# Altium PCB PCB1.PcbDoc
Units mm, origin at the board's own origin, x right, y up, seen from the top; angles counter-clockwise.
Board outline 165.61 x 94.78 mm, 2 copper layers (Top Layer, Bottom Layer); 19 components, 32 nets, 110 pads, 0 vias.
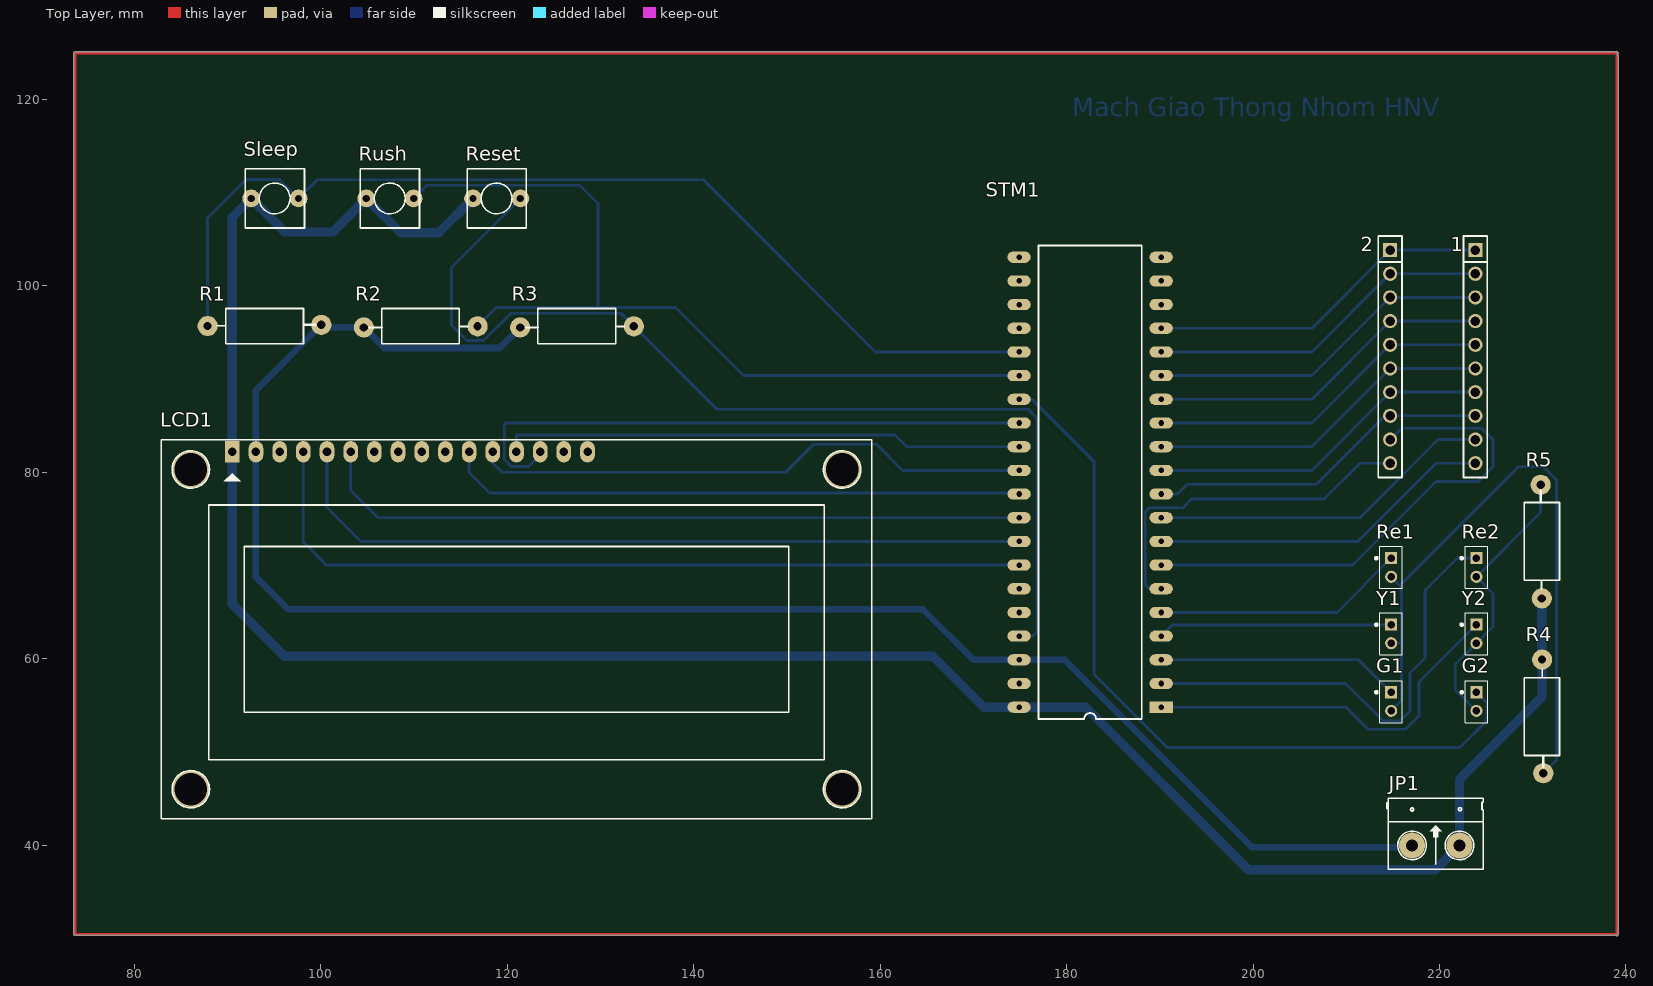
[diagram p0: Top Layer view]
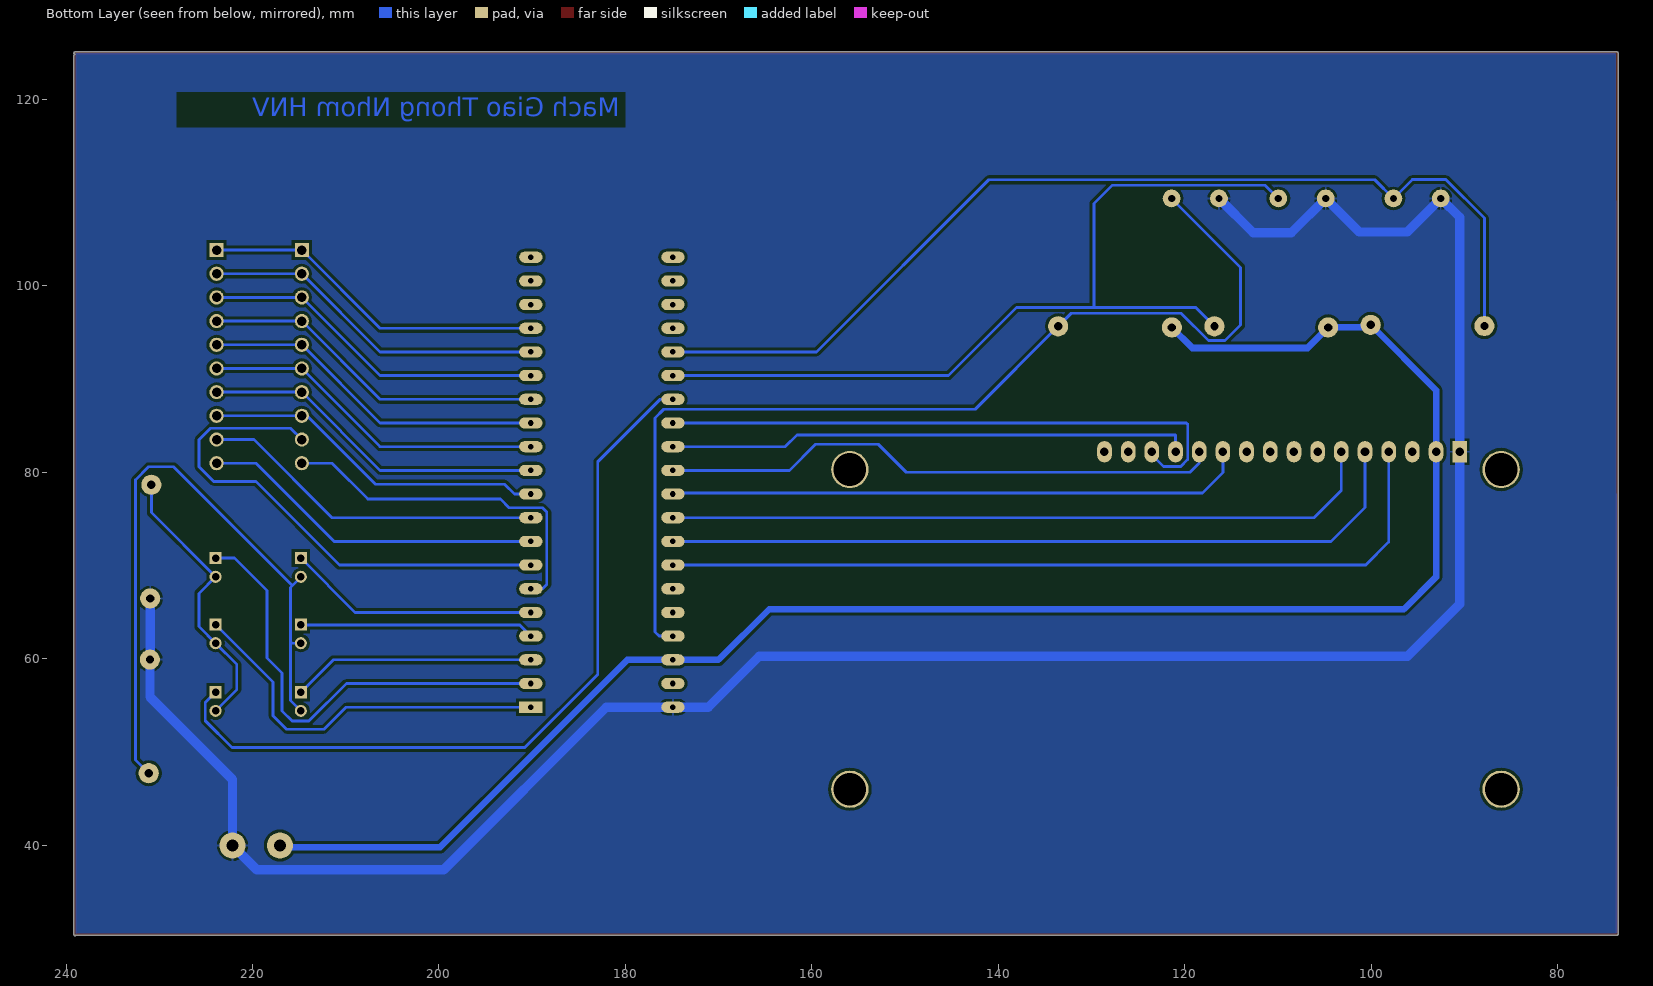
[diagram p1: Bottom Layer view, seen from below]
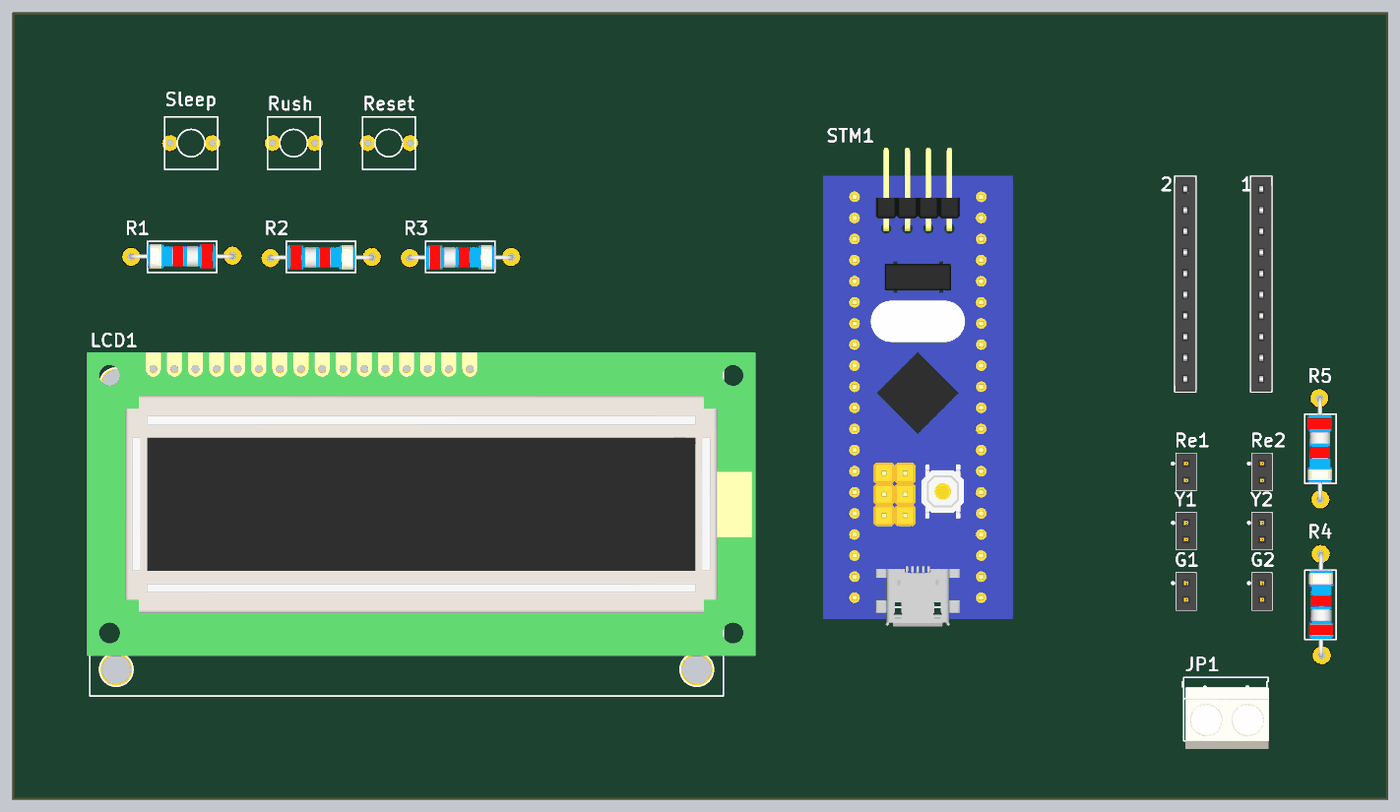
[diagram p2: 3D render of the assembled board from above, using the file's embedded part models]

## Layer stack, top to bottom
Top Solder: solder mask 0.0102, Solder Resist, Dk 3.5
Top Layer: signal copper 0.0356
Dielectric 1: dielectric 0.32, FR-4, Dk 4.8
Bottom Layer: signal copper 0.0356
Bottom Solder: solder mask 0.0102, Solder Resist, Dk 3.5

## Board outline
73.543,30.45 ccw(c73.67,30.45) 73.67,30.323 238.941,30.323 ccw(c239.026,30.418) 239.154,30.418 239.154,31.119 ccw(c239.026,31.119) 239.152,31.141 239.152,124.684 ccw(c239.024,124.684) 239.034,124.811 ccw(c239.024,124.938) 239.152,124.938 ccw(c239.024,124.938) 239.024,125.066 73.67,125.066 ccw(c73.67,124.938) 73.543,124.938

## Design rules (kind name [scope] priority, off if disabled: settings)
Clearance [All] p1: gap=0.3
PolygonConnect [All] p1: connectstyle=Relief reliefconductorwidth=0.254 reliefentries=4 polygonreliefangle="90 Angle" airgapwidth=0.254
RoutingLayers [All] p1: top layer_v5=FALSE bottom layer_v5=TRUE
RoutingVias [All] p1: holewidth=0.711 width=1.27 viastyle="Through Hole" minholewidth=0.711 minwidth=1.27 maxholewidth=0.711 maxwidth=1.27
SolderMaskExpansion [All] p1: expansion=0.102
Width GND [InNet('GND')] p1: maxlimit=1 minlimit=1 preferedwidth=1
Width VCC [InNet('VCC')] p2: maxlimit=0.7 minlimit=0.7 preferedwidth=0.7
Width NET [All] p3: maxlimit=0.3 minlimit=0.3 preferedwidth=0.3
29 further rules are at their usual default settings.

## Components (designator, comment, footprint, x,y, rotation, side; value= is the part's Value field where it differs from the comment)
1 "JP10" JP10-C1T 223.851,103.815 r270 top
2 "JP10" JP10-C1T 214.707,103.815 r270 top
G1 "JP2x1-2.0" J2-C1T 214.814,55.392 r270 top
G2 "JP2x1-2.0" J2-C1T 223.958,55.392 r270 top
JP1 "Header 2_1" HED2 217.059,39.957 r0 top
LCD1 "LCD1602 XL" LCD1602 90.527,82.182 r0 top
R1 "Res" RES-1/2W 94.486,95.669 r180 top
R2 "Res" RES-1/2W 110.23,95.639 r0 top
R3 "Res" RES-1/2W 126.991,95.639 r0 top
R4 "Res" RES-1/2W 231.001,53.293 r90 top
R5 "Res" RES-1/2W 230.971,73.055 r270 top
Re1 "JP2x1-2.0" J2-C1T 214.814,69.775 r270 top
Re2 "JP2x1-2.0" J2-C1T 223.958,69.775 r270 top
Reset "SW" SW2 116.351,109.352 r0 top
Rush "SW" SW2 104.9,109.352 r0 top
Sleep "SW" SW2 92.559,109.352 r0 top
STM1 "KIT STM32F103C8T6" "STM32F103 KIT" 190.152,54.788 r180 top
Y1 "JP2x1-2.0" J2-C1T 214.814,62.647 r270 top
Y2 "JP2x1-2.0" J2-C1T 223.958,62.647 r270 top

## Footprints (in the part's own frame and the unit in brackets; to place one, negate y for a bottom-side part, rotate by r counter-clockwise, add the part's x,y. Pads: shape width x height; smd on the part's side, far side on the other; paste and mask are expansions set on the pad)
HED2 [mil] "Header 2, 2 pin, hight 300mil, Pin to Pin 200, Colour Green"
  round 110 hole 50: 1(0,0) 2(200,0)
  silkscreen extent -106,-100 300,200, body extent -92,-140 302,155, height 394
J2-C1T [mm] "2p, 1 row, straight, gold plating"
  rect 1.3x1.3 hole 0.8: 1(-1,0)
  round 1.3 hole 0.8: 2(1,0)
  silkscreen extent -2.25,-1.71 2.25,1.2, body extent -2.25,-1.2 2.25,1.2, height 4.31
JP10-C1T [mm] "10 row, straight, gold plating"
  rect 1.52x1.52 hole 1.02: 1(0,0)
  round 1.52 hole 1.02: 2(2.54,0) 3(5.08,0) 4(7.62,0) 5(10.16,0) 6(12.7,0) 7(15.24,0) 8(17.78,0) 9(20.32,0) 10(22.86,0)
  silkscreen extent -1.52,-1.27 24.38,1.27, body extent -1.52,-1.25 24.38,1.25, height 8.51
LCD1602 [mil] "LCD dipslay 16x2, 16 pin"
  rect 62x90 hole 36: 1(0,0)
  oval 62x90 hole 36: 2(100,0) 3(200,0) 4(300,0) 5(400,0) 6(500,0) 7(600,0) 8(700,0) 9(800,0) 10(900,0) 11(1000,0) 12(1100,0) 13(1200,0) 14(1300,0) 15(1400,0) 16(1500,0)
  round 157.48 hole 137.8: "Hole 0"(-175,-1425) "Hole 0"(-175,-75) "Hole 0"(2575,-1425) "Hole 0"(2575,-75)
  silkscreen extent -300,-1550 2700,50, body extent -315,-1360 2855,77, height 414
RES-1/2W [mil]
  round 85 hole 35: 1(-220,-5) 2(260,0)
  silkscreen extent -195,-74 221,75, body extent -230,-60 270,56, height 121
"STM32F103 KIT" [mm]
  rect 2.5x1.2 hole 0.6: 1(0,0)
  oval 2.5x1.2 hole 0.6: 2(0,-2.54) 3(0,-5.08) 4(0,-7.62) 5(0,-10.16) 6(0,-12.7) 7(0,-15.24) 8(0,-17.78) 9(0,-20.32) 10(0,-22.86) 11(0,-25.4) 12(0,-27.94) 13(0,-30.48) 14(0,-33.02) 15(0,-35.56) 16(0,-38.1) 17(0,-40.64) 18(0,-43.18) 19(0,-45.72) 20(0,-48.26) 21(15.24,-48.26) 22(15.24,-45.72) 23(15.24,-43.18) 24(15.24,-40.64) 25(15.24,-38.1) 26(15.24,-35.56) 27(15.24,-33.02) 28(15.24,-30.48) 29(15.24,-27.94) 30(15.24,-25.4) 31(15.24,-22.86) 32(15.24,-20.32) 33(15.24,-17.78) 34(15.24,-15.24) 35(15.24,-12.7) 36(15.24,-10.16) 37(15.24,-7.62) 38(15.24,-5.08) 39(15.24,-2.54) 40(15.24,0)
  silkscreen extent 2.09,-49.53 13.16,1.27, body extent -3.81,-53.97 19.05,3.59, height 16.12
SW2 [mil] "SW button 2pin, 250x 250 mil"
  round 75 hole 31: 1(0,0) 2(200,0)
  silkscreen extent -25,-125 225,125

## Part data
1 2: "WR-PHD 2.54 mm Angled Socket Header"
G1 G2 Re1 Re2 Y1 Y2: "WR-PHD 2.00 mm Socket Header"
JP1: "Header, 2-Pin"
LCD1: "LCD 1602 Xanh La"
Reset Rush Sleep: library part SW2, "Switch button 2 pin"
STM1: library part "STM32f103 Bluepill", "KIT STM32F103C8T6 Bluepill"

## Nets (pads, with @x,y where several pads share a name; then routed paths per layer and width w, separated by ;. In a path a pad name is that pad's centre, name@x,y a point inside that pad or via, vN(x,y) a via of type N, cw(c..) or ccw(c..) an arc to the next point about the centre after c; other vN are vias at no path point)
G1: G2.1 STM1.27 | length 83.7
  Bottom Layer w0.3: STM1.27 176.276,87.808 182.969,81.115 182.969,58.306 190.8,50.474 222.204,50.474 225.069,53.34 225.069,55.281 G2.1
GND: JP1.2 LCD1.1 R4.2 R5.2 Reset.1 Rush.1 Sleep.1 STM1.40 | length 248.9
  Bottom Layer w1: Reset.1 112.664,105.665 108.587,105.665 Rush.1 101.304,105.756 96.155,105.756 Sleep.1 90.527,107.32 LCD1.1 90.527,65.846 96.125,60.249 165.659,60.249 171.12,54.788 STM1.40 182.067,54.788 199.517,37.338 219.521,37.338 JP1.2 222.14,47.032 231.001,55.894 R4.2 230.971,59.928 R5.2
Net1_1: 1.1 2.1 STM1.17 | length 37.2
  Bottom Layer w0.3: STM1.17 206.32,95.428 2.1 1.1
Net1_2: 1.2 2.2 STM1.16 | length 37.2
  Bottom Layer w0.3: STM1.16 206.32,92.888 2.2 1.2
Net1_3: 1.3 2.3 STM1.15 | length 37.2
  Bottom Layer w0.3: STM1.15 206.32,90.348 2.3 1.3
Net1_4: 1.4 2.4 STM1.14 | length 37.2
  Bottom Layer w0.3: STM1.14 206.32,87.808 2.4 1.4
Net1_5: 1.5 2.5 STM1.13 | length 37.2
  Bottom Layer w0.3: STM1.13 206.32,85.268 2.5 1.5
Net1_6: 1.6 2.6 STM1.12 | length 37.2
  Bottom Layer w0.3: STM1.12 206.32,82.728 2.6 1.6
Net1_7: 1.7 2.7 STM1.11 | length 37.2
  Bottom Layer w0.3: STM1.11 206.32,80.188 2.7 1.7
Net1_8: 1.8 2.8 STM1.10 | length 37.2
  Bottom Layer w0.3: STM1.10 191.899,77.648 192.954,78.703 206.794,78.703 214.126,86.035 2.8 1.8
Net1_9: 1.9 STM1.9 | length 37.2
  Bottom Layer w0.3: STM1.9 211.47,75.108 219.857,83.495 1.9
Net1_10: 1.10 STM1.8 | length 37.2
  Bottom Layer w0.3: STM1.8 211.23,72.568 219.617,80.955 1.10
Net2_9: 2.9 STM1.7 | length 54.9
  Bottom Layer w0.3: STM1.7 210.667,70.028 219.633,78.994 224.155,78.994 225.74,80.579 225.74,83.467 224.498,84.709 215.921,84.709 2.9
Net2_10: 2.10 STM1.6 | length 38.1
  Bottom Layer w0.3: STM1.6 188.9,67.488 188.443,67.945 188.443,75.705 188.912,76.175 192.494,76.175 193.421,77.102 207.631,77.102 211.484,80.955 2.10
NetG1_1: G1.1 STM1.3 | length 26.1
  Bottom Layer w0.3: STM1.3 211.339,59.868 G1.1
NetG1_2: G1.2 R4.1 Re1.2 Y1.2 | length 71.2
  Bottom Layer w0.3: G1.2 215.914,55.492 215.914,61.811 ; Y1.2 215.75,61.647 215.914,61.811 ; Re1.2 214.814,68.736 215.768,67.781 ; R4.1 232.537,49.114 232.537,79.172 231.14,80.569 228.473,80.569 215.768,67.864 215.768,67.781 ; 215.768,67.781 215.914,67.636 215.914,61.811
NetG2_2: G2.2 R5.1 Re2.2 Y2.2 | length 30.5
  Bottom Layer w0.3: G2.2 221.681,56.67 221.681,59.37 Y2.2 225.753,63.442 225.753,66.981 Re2.2 230.844,75.661 R5.1
NetLCD1_4: LCD1.4 STM1.34 | length 87.5
  Bottom Layer w0.3: LCD1.4 98.147,72.49 100.609,70.028 STM1.34
NetLCD1_5: LCD1.5 STM1.33 | length 81.7
  Bottom Layer w0.3: LCD1.5 100.687,76.2 104.319,72.568 STM1.33
NetLCD1_6: LCD1.6 STM1.32 | length 77
  Bottom Layer w0.3: LCD1.6 103.227,78.048 106.167,75.108 STM1.32
NetLCD1_11: LCD1.11 STM1.31 | length 62.2
  Bottom Layer w0.3: LCD1.11 115.927,79.958 118.11,77.775 174.269,77.775 174.269,77.648 STM1.31
NetLCD1_12: LCD1.12 STM1.30 | length 60.5
  Bottom Layer w0.3: LCD1.12 118.467,80.962 119.44,79.989 149.89,79.989 152.887,82.986 159.609,82.986 162.407,80.188 STM1.30
NetLCD1_13: LCD1.13 STM1.29 | length 56.2
  Bottom Layer w0.3: LCD1.13 121.007,83.987 161.601,83.987 162.861,82.728 STM1.29
NetLCD1_14: LCD1.14 STM1.28 | length 64.1
  Bottom Layer w0.3: LCD1.14 123.547,81.839 122.298,80.589 120.452,80.589 119.705,81.336 119.705,83.051 119.7,83.055 119.7,85.131 119.837,85.268 STM1.28
NetRe1_1: Re1.1 STM1.5 | length 27.1
  Bottom Layer w0.3: STM1.5 208.987,64.948 Re1.1
NetRe2_1: Re2.1 STM1.2 | length 49.3
  Bottom Layer w0.3: STM1.2 209.931,57.328 213.967,53.292 215.736,53.292 216.843,54.398 216.843,58.452 218.459,60.068 218.459,67.287 221.948,70.775 Re2.1
NetSTM1_1: STM1.1 Y2.1 | length 41.6
  Bottom Layer w0.3: STM1.1 209.964,54.788 212.334,52.417 216.342,52.417 217.799,53.875 217.799,57.488 Y2.1
NetSTM1_4: STM1.4 Y1.1 | length 25.2
  Bottom Layer w0.3: STM1.4 191.339,63.594 214.761,63.594 Y1.1
RESET: R3.2 Reset.2 STM1.37 | length 111.1
  Bottom Layer w0.3: Reset.2 114.027,101.948 114.027,95.777 115.694,94.11 117.475,94.11 120.407,97.042 132.192,97.042 R3.2 142.493,86.741 175.895,86.741 176.835,85.801 176.835,62.865 176.378,62.408 STM1.37
RUSH: R2.2 Rush.2 STM1.26 | length 94.3
  Bottom Layer w0.3: Rush.2 111.383,110.754 127.802,110.754 129.766,108.791 129.766,97.727 129.68,97.642 ; R2.2 118.837,97.642 129.68,97.642 ; STM1.26 145.364,90.348 138.07,97.642 129.68,97.642
SLEEP: R1.2 Sleep.2 STM1.25 | length 109.6
  Bottom Layer w0.3: R1.2 87.882,107.237 92.024,111.379 95.612,111.379 Sleep.2 99.641,111.354 141.045,111.354 159.512,92.888 STM1.25
VCC: JP1.1 LCD1.2 R1.1 R2.1 R3.1 STM1.38 | length 189.3
  Bottom Layer w0.7: R3.1 119.2,93.31 106.845,93.31 R2.1 100.358,95.512 R1.1 93.067,88.79 LCD1.2 93.067,68.744 96.508,65.303 164.592,65.303 170.028,59.868 STM1.38 179.781,59.868 199.892,39.757 216.86,39.757 JP1.1
pads on no net: "LCD1.Hole 0" LCD1.3 LCD1.7 LCD1.8 LCD1.9 LCD1.10 LCD1.15 LCD1.16 STM1.18 STM1.19 STM1.20 STM1.21 STM1.22 STM1.23 STM1.24 STM1.35 STM1.36 STM1.39
copper on no net: | length 519.6
  Top Layer w0.254: 238.993,30.45 73.67,30.45 73.67,124.938 239.024,124.938 ; 239.024,30.958 239.024,124.684 ; 239.026,30.418 239.026,31.119

## Polygon pours and split planes (outlines as drawn)
GND on Bottom Layer "Bottom Layer-No Net" (solid, remove dead copper, pour order 0): 73.816,124.943 73.853,124.907 238.979,124.907 238.979,30.399 238.959,30.379 238.804,30.534 73.649,30.534

## Other copper
Bottom Layer:
  text "Mach Giao Thong Nhom HNV" at 180.592,118.186 h2